# Altium PCB picwithusb_REV_2_0.PcbDoc
Units mil, origin at the board's own origin, x right, y up, seen from the top; angles counter-clockwise.
Board outline 3650 x 2755 mil, 2 copper layers (Top Layer, Bottom Layer); 71 components, 75 nets, 334 pads, 37 vias.
Unrouted connection lines stored in the file: 1.
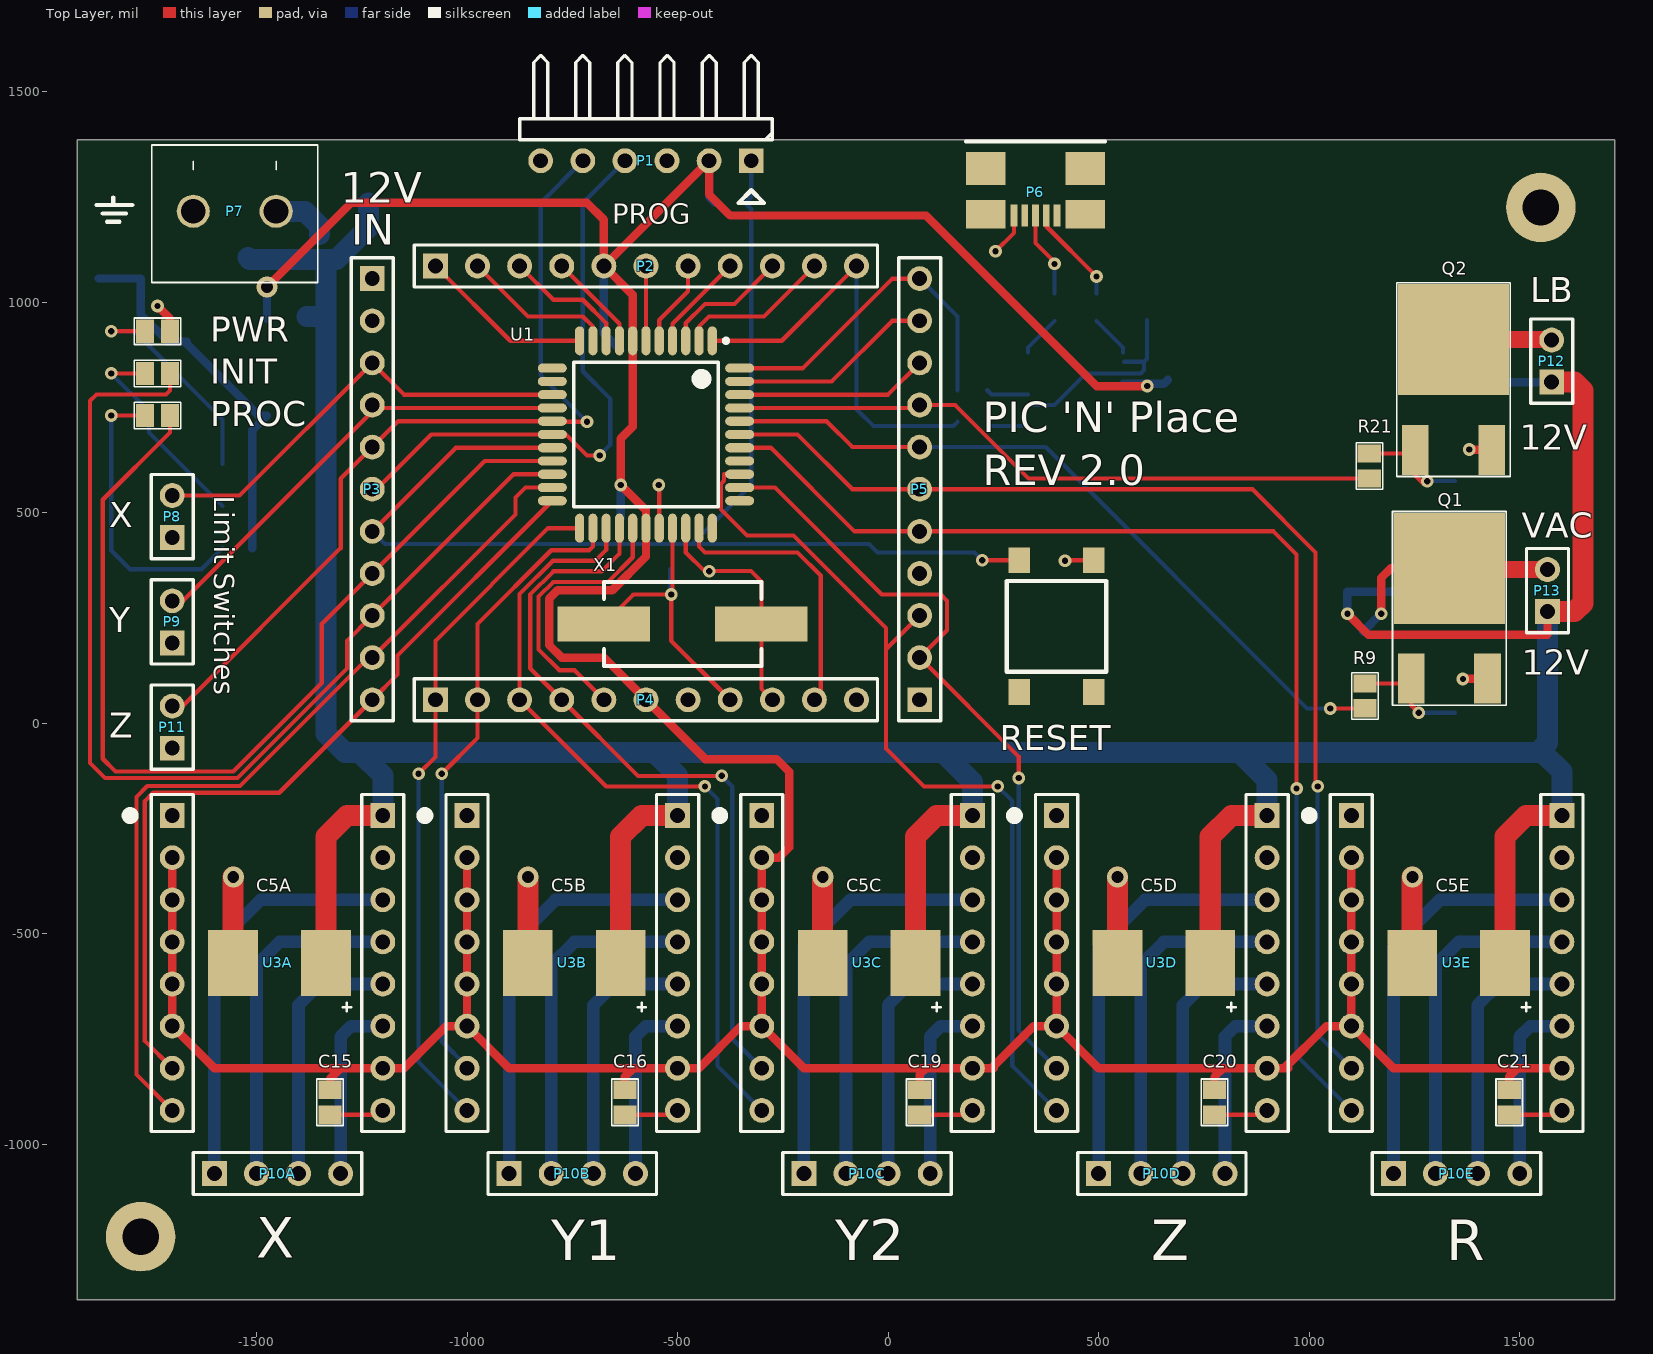
[diagram p0: Top Layer view]
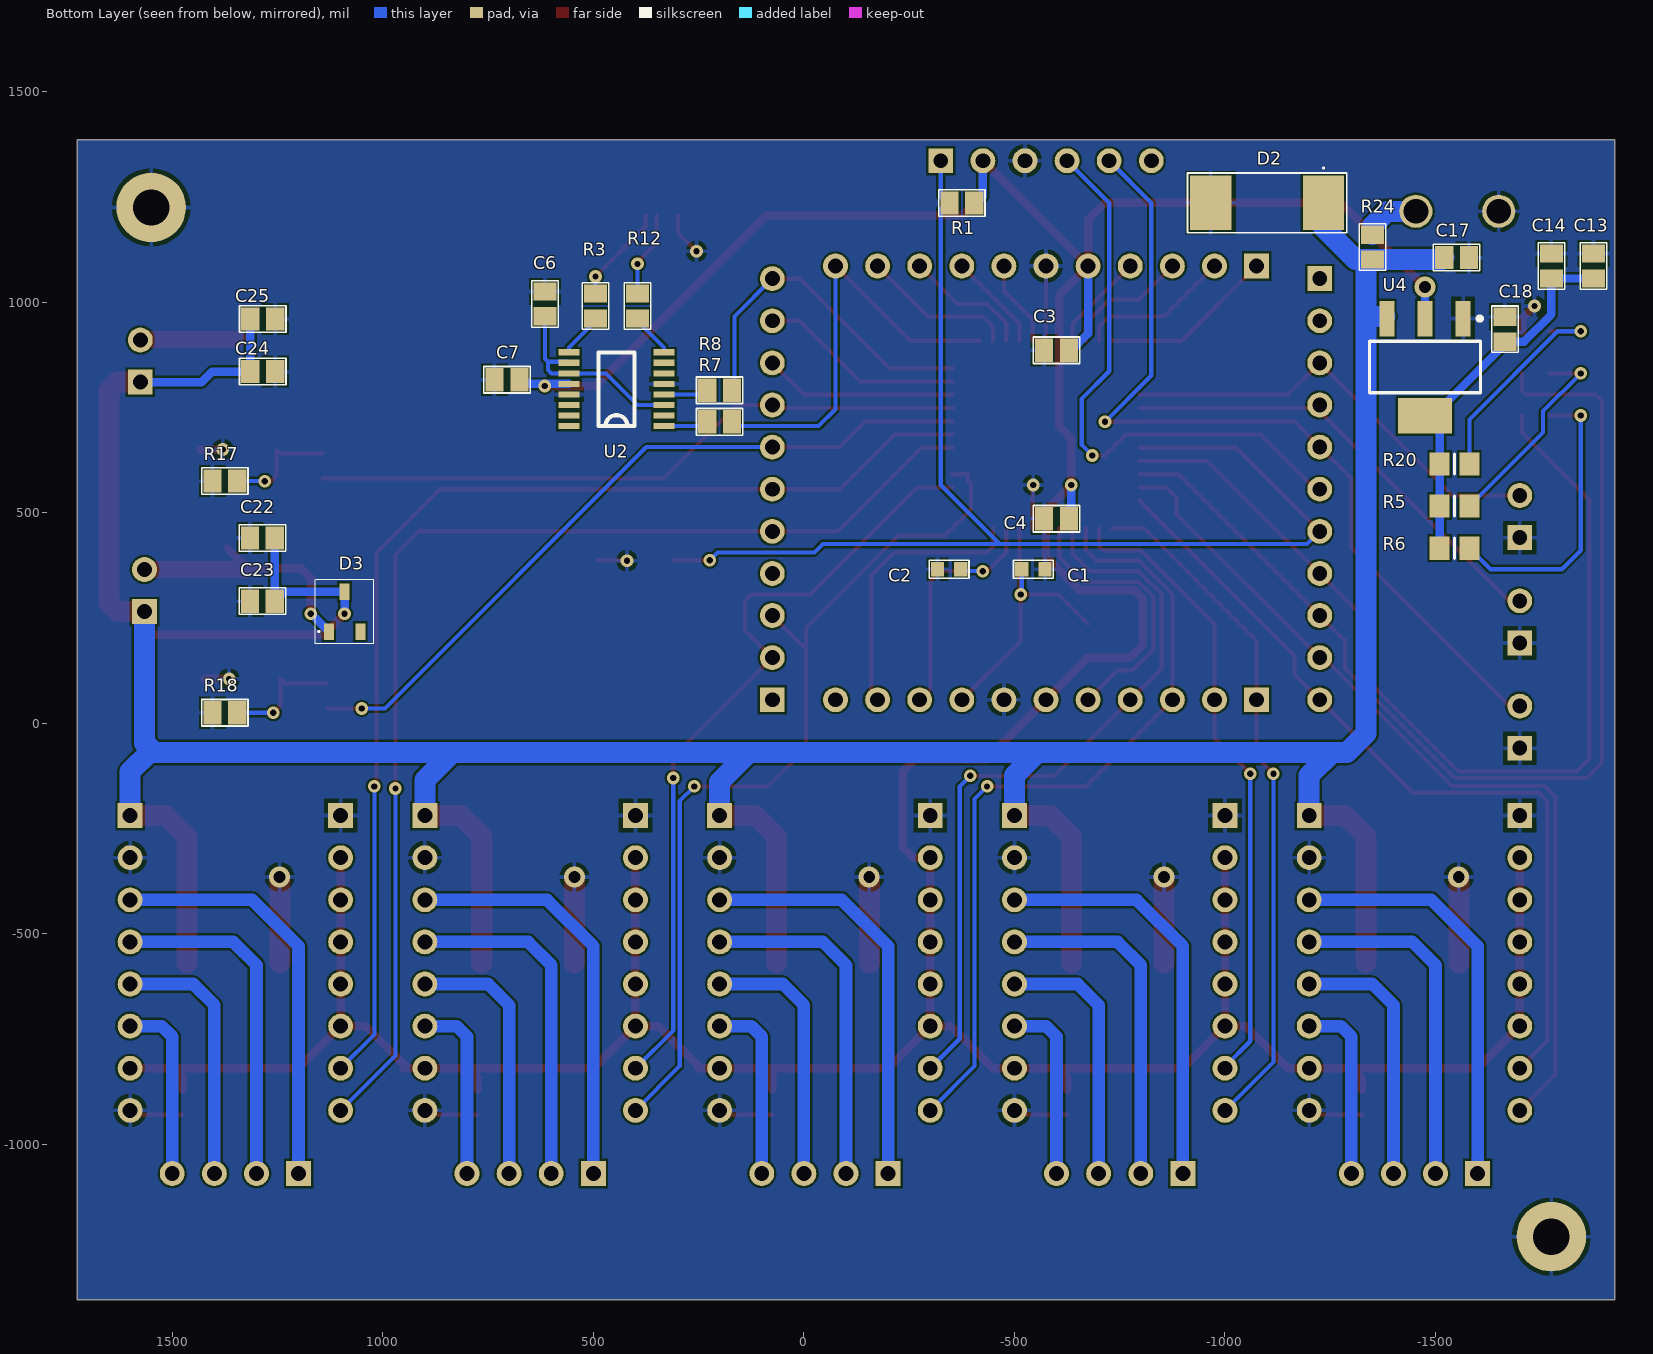
[diagram p1: Bottom Layer view, seen from below]

## Layer stack, top to bottom
Top Solder: solder mask 0.4, Solder Resist, Dk 3.5
Top Layer: signal copper 1.4
Dielectric 1: dielectric 12.6, FR-4, Dk 4.8
Bottom Layer: signal copper 1.4
Bottom Solder: solder mask 0.4, Solder Resist, Dk 3.5

## Board outline
-1925,-1369.21 -1925,1385.79 1725,1385.79 1725,-1369.21

## Design rules (kind name [scope] priority, off if disabled: settings)
Clearance [All] p1: gap=5
PolygonConnect [All] p1: connectstyle=Relief reliefconductorwidth=10 reliefentries=4 polygonreliefangle="90 Angle" airgapwidth=10
RoomDefinition D1 [InComponentClass('D1')] p1: confinementstyle=ConfineIn formatcopy=TRUE lockcomponents=FALSE outline -1825,-1144.21 -1125,-1144.21 -1125,-144.21 -1825,-144.21
RoomDefinition D3 [InComponentClass('D3')] p2: confinementstyle=ConfineIn formatcopy=TRUE lockcomponents=FALSE outline -425,-1144.21 275,-1144.21 275,-144.21 -425,-144.21
RoomDefinition D2 [InComponentClass('D2')] p3: confinementstyle=ConfineIn formatcopy=TRUE lockcomponents=FALSE outline -1125,-1144.21 -425,-1144.21 -425,-144.21 -1125,-144.21
RoomDefinition D4 [InComponentClass('D4')] p4: confinementstyle=ConfineIn formatcopy=TRUE lockcomponents=FALSE outline 275,-1144.21 975,-1144.21 975,-144.21 275,-144.21
RoomDefinition D5 [InComponentClass('D5')] p5: confinementstyle=ConfineIn formatcopy=TRUE lockcomponents=FALSE outline 975,-1144.21 1675,-1144.21 1675,-144.21 975,-144.21
RoutingVias [All] p1: holewidth=15 width=30 viastyle="Through Hole" minholewidth=10 minwidth=14 maxholewidth=28 maxwidth=50
SolderMaskExpansion [All] p1: expansion=4
Width [All] p1: maxlimit=100 minlimit=10 preferedwidth=10
30 further rules are at their usual default settings.

## Classes and differential pairs
component class "Light Box and Vaccuum": C22 C23 C24 C25 D3 P12 P13 Q1 Q2 R9 R17 R18 R21
component class MCU: C1 C2 C3 C4 C15 C16 C19 C20 C21 INIT P1 P2 P3 P4 P5 P8 P9 P11 PROC R1 R5 R6 RESET U1 X1
component class USB: C6 C7 P6 R3 R7 R8 R12 U2
component class D1: C5A P10A U3A
component class D2: C5B P10B U3B
component class D3: C5C P10C U3C
component class D4: C5D P10D U3D
component class D5: C5E P10E U3E
channel class StepperDriver: DRV1 DRV2 DRV3 DRV4 DRV5
component class "Power Supply": C13 C14 C17 C18 D2 P7 PWR R20 R24 U4

## Components (designator, comment, footprint, x,y, rotation, side; value= is the part's Value field where it differs from the comment)
C1 "Cap" 0603 -545,365.79 r0 bottom
C2 "Cap" 0603 -345,365.79 r180 bottom
C3 "Cap" 0805 -600,885.79 r180 bottom
C4 "Cap" 0805 -600,485.79 r180 bottom
C5A "Cap" "Aluminum Electrolytic Short" -1335,-569.21 r180 top (schematic designator C5)
C5B "Cap" "Aluminum Electrolytic Short" -635,-569.21 r180 top (schematic designator C5)
C5C "Cap" "Aluminum Electrolytic Short" 65,-569.21 r180 top (schematic designator C5)
C5D "Cap" "Aluminum Electrolytic Short" 765,-569.21 r180 top (schematic designator C5)
C5E "Cap" "Aluminum Electrolytic Short" 1465,-569.21 r180 top (schematic designator C5)
C6 "Cap" 0805 615,995.79 r270 bottom
C7 "Cap" 0805 705,815.79 r180 bottom
C13 "Cap" 0805 -1875,1085.79 r270 bottom
C14 "Cap" 0805 -1775,1085.79 r270 bottom
C15 "Cap" 0805 -1325,-900 r90 top
C16 "Cap" 0805 -625,-900 r90 top
C17 "Cap" 0805 -1550,1105.79 r0 bottom
C18 "Cap" 0805 -1665,935.79 r270 bottom
C19 "Cap" 0805 75,-900 r90 top
C20 "Cap" 0805 775,-900 r90 top
C21 "Cap" 0805 1475,-900 r90 top
C22 "Cap" 0805 1285.79,440 r180 bottom
C23 "Cap" 0805 1285.79,290 r180 bottom
C24 "Cap" 0805 1285,835 r0 bottom
C25 "Cap" 0805 1285,960 r0 bottom
D2 "Diode S8MC" "S8MC Diode" -1100,1235.79 r180 bottom
D3 "Diode MMBD914" SOT-23 1090.79,265 r90 bottom
INIT "LED1" 0805 -1735,830.79 r0 top
P1 "PICkit3 Connector" "Right Angle PICkit Connector" -325,1335.79 r180 top
P2 "Header 11" HDR1X11 -1075,1085.79 r0 top
P3 "Header 11" HDR1X11 -1225,1055.79 r270 top
P4 "Header 11" HDR1X11 -1075,55.79 r0 top
P5 "Header 11" HDR1X11 75,55.79 r90 top
P6 "USB-B Micro" "USB B Micro WM14338CT-ND" 350,1205.79 r270 top
P7 "Screw Terminal" "Screw Terminal" -1650,1215.79 r0 top
P8 "Header 2" HDR1X2 -1700,440.79 r90 top
P9 "Header 2" HDR1X2 -1700,190.79 r90 top
P10A "Header 4" HDR1X4 -1600,-1069.21 r0 top (schematic designator P10)
P10B "Header 4" HDR1X4 -900,-1069.21 r0 top (schematic designator P10)
P10C "Header 4" HDR1X4 -200,-1069.21 r0 top (schematic designator P10)
P10D "Header 4" HDR1X4 500,-1069.21 r0 top (schematic designator P10)
P10E "Header 4" HDR1X4 1200,-1069.21 r0 top (schematic designator P10)
P11 "Header 2" HDR1X2 -1700,-59.21 r90 top
P12 "Header 2" HDR1X2 1575.79,810 r90 top
P13 "Header 2" HDR1X2 1565.79,265 r90 top
PROC "LED2" 0805 -1735,730.79 r0 top
PWR "LED0" 0805 -1735,930.79 r0 top
Q1 "MOSFET-N" DPAK 1332.79,368 r270 top
Q2 "MOSFET-N" DPAK 1342.79,911 r270 top
R1 "Res1" 0805 -375,1235.79 r180 bottom
R3 "Res1" 0805 495,990.79 r270 bottom
R5 "Res1" 6-0805_N -1545,515.79 r0 bottom
R6 "Res1" 6-0805_N -1545,415.79 r0 bottom
R7 "Res1" 0805 200,715.79 r180 bottom
R8 "Res1" 0805 200,790.79 r0 bottom
R9 "Res1" 0805 1132.79,65 r90 top
R12 "Res1" 0805 395,990.79 r270 bottom
R17 "Resistor" 0805 1375,575 r180 bottom
R18 "Resistor" 0805 1375,25 r180 bottom
R20 "Res1" 6-0805_N -1545,615.79 r0 bottom
R21 "Res1" 0805 1142.79,611 r90 top
R24 "Chip PTC" 0805 -1350,1130.79 r270 bottom
RESET "Switch" TACT_SWITCH 400,230.79 r270 top
U1 "PIC18F4550-I/PT" TQFP-PT44_N -575,685.79 r270 top
U2 "FTDI" FTDI_SSOP_16 445,705.79 r90 bottom
U3A "A4988 Module" "A4988 Header" -1700,-219.21 r0 top (schematic designator U3)
U3B "A4988 Module" "A4988 Header" -1000,-219.21 r0 top (schematic designator U3)
U3C "A4988 Module" "A4988 Header" -300,-219.21 r0 top (schematic designator U3)
U3D "A4988 Module" "A4988 Header" 400,-219.21 r0 top (schematic designator U3)
U3E "A4988 Module" "A4988 Header" 1100,-219.21 r0 top (schematic designator U3)
U4 "5V Reg" "4-Pin SOT223" -1475,845.79 r270 bottom
X1 "Crystal" HC49-US -675,235.79 r0 top

## Footprints (in the part's own frame and the unit in brackets; to place one, negate y for a bottom-side part, rotate by r counter-clockwise, add the part's x,y. Pads: shape width x height; smd on the part's side, far side on the other; paste and mask are expansions set on the pad)
"4-Pin SOT223" [mm] "SOT223, 4-Leads, Body 6.50x7.00mm (avg), Pitch 2.30mm, IPC Medium Density"
  rect 2.15x0.9 smd: 1(-2.925,2.3) 2(-2.925,0) 3(-2.925,-2.3)
  rect 2.15x3.25 smd: 2(2.925,0)
  silkscreen extent -3.05,-3.35 1.55,3.42, body extent -1.85,-3.35 1.85,3.35, height 1.8
6-0805_N [mm] "Chip Resistor, Body 2.0x1.2mm, IPC Medium Density"
  rect 1.2x1.4 smd: 1(-0.9,0) 2(0.9,0)
  silkscreen extent 0,-0.6 0,0.6, body extent -1.07,-0.7 1.07,0.7, height 0.7
0603 [mm]
  rect 0.8x0.9 smd: 1(-0.7,0) 2(0.7,0)
  silkscreen extent -1.2,-0.55 1.2,0.55, body extent -0.87,-0.47 0.88,0.48, height 1.3
0805 [mm]
  rect 1.1x1.4 smd: 1(-0.75,0) 2(0.75,0)
  silkscreen extent -1.4,-0.8 1.4,0.8, body extent -1.1,-0.72 1.1,0.72, height 1.4
"A4988 Header" [mm] "A4988 Header"
  rect 1.5x1.5 hole 0.9: 1(0,0) 16(12.7,0)
  round 1.5 hole 0.9: 2(0,-2.54) 3(0,-5.08) 4(0,-7.62) 5(0,-10.16) 6(0,-12.7) 7(0,-15.24) 8(0,-17.78) 9(12.7,-17.78) 10(12.7,-15.24) 11(12.7,-12.7) 12(12.7,-10.16) 13(12.7,-7.62) 14(12.7,-5.08) 15(12.7,-2.54)
  silkscreen extent -2.67,-19.05 13.97,1.27, body extent -1.27,-19.05 13.97,1.27, height 11.54
"Aluminum Electrolytic Short" [mm] "6.3x5.8mm, 100uF, 35V aluminum electrolytic cap"
  rect 3x4 smd: 1(0,0) 2(5.6,0)
  silkscreen extent -1.52,2.41 -1.02,2.92, body extent -0.81,-3.17 6.19,3.43, height 3.91
DPAK [mm] "DPAK"
  rect 3x1.6 smd: 1(6.65,-2.3) 3(6.65,2.3)
  rect 6.7x6.7 smd: 2(0,0)
  silkscreen extent -3.43,-3.43 8.25,3.43, body extent -2.6,-3.37 7.5,3.37, height 2.37
FTDI_SSOP_16 [mil]
  rect 15x50 smd: 1(0,-113) 2(25,-113) 3(50,-113) 4(75,-113) 5(100,-113) 6(125,-113) 7(150,-113) 8(175,-113) 9(175,113) 10(150,113) 11(125,113) 12(100,113) 13(75,113) 14(50,113) 15(25,113) 16(0,113)
  silkscreen extent 0,-43 175,43
HC49-US [mil]
  rect 220x83 smd: 1(0,0) 2(374,0)
  silkscreen extent 0,-100 374,100, body extent -69,-93 451,95, height 169
HDR1X2 [mm] "Connector; Header; 2 Position"
  rect 1.5x1.5 hole 0.9: 1(0,0)
  round 1.5 hole 0.9: 2(2.54,0)
  silkscreen extent -1.27,-1.27 3.81,1.27, body extent -1.27,-1.27 3.81,1.27, height 8.61
HDR1X4 [mm] "Connector; Header; 4 Position"
  rect 1.5x1.5 hole 0.9: 1(0,0)
  round 1.5 hole 0.9: 2(2.54,0) 3(5.08,0) 4(7.62,0)
  silkscreen extent -1.27,-1.27 8.89,1.27, body extent -1.27,-1.27 8.89,1.27, height 8.61
HDR1X11 [mm] "Connector; Header; 11 Position"
  rect 1.5x1.5 hole 0.9: 1(0,0)
  round 1.5 hole 0.9: 2(2.54,0) 3(5.08,0) 4(7.62,0) 5(10.16,0) 6(12.7,0) 7(15.24,0) 8(17.78,0) 9(20.32,0) 10(22.86,0) 11(25.4,0)
  silkscreen extent -1.27,-1.27 26.67,1.27, body extent -1.27,-1.27 26.67,1.27, height 8.61
"Right Angle PICkit Connector" [mm] "Right Angle PICkit Connector"
  rect 1.5x1.5 hole 0.9: 1(0,0)
  round 1.5 hole 0.9: 2(2.54,0) 3(5.08,0) 4(7.62,0) 5(10.16,0) 6(12.7,0)
  silkscreen extent -1.27,-6.35 13.97,2.54, body extent -1.27,-6.67 13.97,1.27, height 4.8
"S8MC Diode" [mm] "S8MC 8A Diode"
  rect 2.5x3.3 smd: 1(-3.4,0) 2(3.4,0)
  silkscreen extent -4.8,-1.8 4.8,2.15
"Screw Terminal" [mm] "Phoenix Screw Terminal"
  round 2 hole 1.5: 1(0,0) 2(5,0)
  silkscreen extent -2.5,-4.3 7.5,4
SOT-23 [mm] "Standard SOT-23"
  rect 1x0.6 smd: 1(-1.2,0.95) 2(-1.2,-0.95) 3(1.2,0)
  silkscreen extent -1.92,-1.75 1.92,1.75, body extent -1.23,-1.47 1.27,1.53, height 1.05
TACT_SWITCH [mm]
  rect 1.55x1.3 smd: 1(-3.975,2.25) 2(3.975,2.25) 3(-3.975,-2.25) 4(3.975,-2.25)
  silkscreen extent -2.73,-3 2.75,3, body extent -4.25,-3.3 4.25,3.3, height 4.3
TQFP-PT44_N [mm] "Thin QFP, 44-Leads, Body 10x10mm, Pitch 0.8mm, IPC Medium Density"
  oval 1.75x0.55 smd: 1(-5.65,4) 2(-5.65,3.2) 3(-5.65,2.4) 4(-5.65,1.6) 5(-5.65,0.8) 6(-5.65,0) 7(-5.65,-0.8) 8(-5.65,-1.6) 9(-5.65,-2.4) 10(-5.65,-3.2) 11(-5.65,-4) 23(5.65,-4) 24(5.65,-3.2) 25(5.65,-2.4) 26(5.65,-1.6) 27(5.65,-0.8) 28(5.65,0) 29(5.65,0.8) 30(5.65,1.6) 31(5.65,2.4) 32(5.65,3.2) 33(5.65,4)
  oval 0.55x1.75 smd: 12(-4,-5.65) 13(-3.2,-5.65) 14(-2.4,-5.65) 15(-1.6,-5.65) 16(-0.8,-5.65) 17(0,-5.65) 18(0.8,-5.65) 19(1.6,-5.65) 20(2.4,-5.65) 21(3.2,-5.65) 22(4,-5.65) 34(4,5.65) 35(3.2,5.65) 36(2.4,5.65) 37(1.6,5.65) 38(0.8,5.65) 39(0,5.65) 40(-0.8,5.65) 41(-1.6,5.65) 42(-2.4,5.65) 43(-3.2,5.65) 44(-4,5.65)
  silkscreen extent -5.77,-4.35 4.35,4.95, body extent -5,-5 5,5, height 1.2
"USB B Micro WM14338CT-ND" [mm] "MOLEX Micro USB Connector WM14338CT-ND"
  rect 1.35x0.4 smd: 1(0,1.3) 2(0,0.65) 3(0,0) 4(0,-0.65) 5(0,-1.3)
  rect 2x2.4 smd: TAB(-2.825,3) TAB(-2.825,-3)
  rect 1.7x2.4 smd: TAB(-0.075,3) TAB(-0.075,-3)
  silkscreen extent -4.45,-4.2 -4.45,4.2, body extent -5.38,-3.99 0.05,3.99, height 2.77

## Part data
C1 C2 C3 C4 C13 C14 C15 C16 C17 C18 C19 C20 C21 C22 C23 C24 C25: "Capacitor"
C5A C5B C5C C5D C5E: library part "Electrolytic Cap", "Electrolytic Cap"
C6 C7: library part Capacitor, "Chip Capacitor"
D2 D3: "Standard Diode"
INIT PROC: library part LED0, "Typical INFRARED GaAs LED"
P1: library part "PICkit 3 Connector", "PICkit 3 Connector"
P2 P3 P4 P5: "Header, 11-Pin"
P6: library part "USB-B Micro 4 Pad", "USB-B SMT Connector"
P8 P9 P11 P12 P13: "Header, 2-Pin"
P10A P10B P10C P10D P10E: "Header, 4-Pin"
PWR: "Typical INFRARED GaAs LED"
Q1 Q2: library part "N-Channel MOSFET", "N-Channel MOSFET"
R1 R3 R5 R6 R7 R8 R9 R12 R20 R21: "Resistor"
R17 R18: "Chip Resistor"
R24: library part PTC, "PTC"
U1: "High Performance, Enhanced Flash, USB Microcontroller with nanoWatt Technology, 32K Flash, 44-Pin TQFP, Industrial Temperature Range"
U2: "USB-UART Converter"
U4: library part "5V Linear Regulator", "5V Linear Regulator"
X1: library part "Crystal 2-pin", "2-pin crystal resonator"

## Free pads (board coordinates)
  round 165 hole 86: MOUNT(-1775,-1219.21) MOUNT(1550,1225)

## Via types
v1: diameter 30, hole 15, Top Layer to Bottom Layer, 31 vias
v2: diameter 50, hole 28, Top Layer to Bottom Layer, 6 vias

## Nets (pads, with @x,y where several pads share a name; then routed paths per layer and width w, separated by ;. In a path a pad name is that pad's centre, name@x,y a point inside that pad or via, vN(x,y) a via of type N, cw(c..) or ccw(c..) an arc to the next point about the centre after c; other vN are vias at no path point)
1: RESET.2
4: RESET.4
CLK_IN: C1.2 P4.8 U1.30 X1.1 | length 713.3
  Top Layer w10: X1.1 -605,305.79 v1(-515,305.79) ; U1.30 -512.01,308.78 v1(-515,305.79) ; P4.8 -515,195.79 v1(-515,305.79)
  Bottom Layer w10: v1@-517.44,308.23 C1.2
CLK_OUT: C2.2 P4.9 U1.31 X1.2 | length 605.6
  Top Layer w10: U1.31@-480,462.84 U1.31 -480.51,405.79 -436.02,361.3 v1(-424.49,361.3) -325.51,361.3 -301,336.79 X1.2 -301,81.79 P4.9
  Bottom Layer w10: v1(-424.49,361.3) C2.2@-377.05,361.3
DIR1: P3.10 U1.21 U3A.8 | length 2094.8
  Top Layer w10: U3A.8 -1785,-834.21 -1785,-175 -1759.21,-149.21 -1539.21,-149.21 -1234.21,155.79 P3.10 -885,495.79 -885,535.79 -860.98,559.81 U1.21
DIR2: P4.1 U1.23 U3B.8 | length 1632.6
  Top Layer w10: v1(-1115,-120) -1075,-80 P4.1 -1075,195.79 -807.44,463.35 U1.23
  Bottom Layer w10: v1(-1115,-120) -1115,-804.21 U3B.8
DIR3: P4.3 U1.25 U3C.8 | length 1902.3
  Top Layer w10: U1.25 -669.49,411.3 -695,385.79 -796.21,385.79 -875,307 P4.3 -669.21,-150 v1(-435,-150)
  Bottom Layer w10: v1(-435,-150) -405,-180 -405,-814.21 U3C.8
DIR4: P5.3 U1.36 U3D.8 | length 2160.8
  Top Layer w10: U1.36 -389.49,591.3 -389.49,575.95 -397.01,568.43 -397.01,507.8 -335,445.79 -225,445.79 -5,225.79 -5,175.79 ; P5.3 -5,175.79 ; v1(260,-150) 85,-150 -5,-60 -5,175.79
  Bottom Layer w10: v1(260,-150) 295,-185 295,-814.21 U3D.8
DIR5: P5.5 U1.38 U3E.8 | length 2801.4
  Top Layer w10: U1.38 -278.5,654.29 -80,455.79 P5.5 915,455.79 970,400.79 v1(970,-155)
  Bottom Layer w10: v1(970,-155) 970,-789.21 U3E.8
GND: C1.1 C2.1 C3.1 C4.1 C5A.2 C5B.2 C5C.2 C5D.2 C5E.2 C6.1 C7.1 C13.1 C14.1 C15.1 C16.1 C17.1 C18.1 C19.1 C20.1 C21.1 C22.1 C23.1 C24.1 C25.1 D2.1 P1.3 P2.6 P4.7 P6.5 P7.1 P8.1 P9.1 P11.1 pad.MOUNT PWR.2 Q1.3 Q2.3 R17.1 R18.1 RESET.1 U1.6 U1.29 U2.5 U2.13 U3A.1 U3A.9 U3A.15 U3B.1 U3B.9 U3B.15 U3C.1 U3C.9 U3C.15 U3D.1 U3D.9 U3D.15 U3E.1 U3E.9 U3E.15 U4.1 | length 2288.2
  Top Layer w10: C15.1 -1210.32,-929.53 U3A.9 ; C16.1 U3B.9@-510.32,-929.53 ; U1.6 P2.6 ; v1(-545,565.79) -543.5,564.29 U1.29 ; C19.1 189.68,-929.53 U3C.9 ; v1(255,1120.79) 298.82,1164.61 P6.5 ; v1@421.5,387.29 RESET.1 ; C20.1 889.68,-929.53 U3D.9 ; C21.1 1589.68,-929.53 U3E.9
  Top Layer w20: v1(-1735,990.79) -1705.47,961.26 PWR.2 ; v1(420,385.79) v1@421.5,387.29 ; v1(1365,105) 1366.19,106.19 Q1.3 ; v1(1380,650) 1380.81,649.19 Q2.3
  Top Layer w50: C5A.2 v2@-1555.47,-365.47 ; C5B.2 v2@-855.47,-365.47 ; C5C.2 v2@-155.47,-365.47 ; C5D.2 v2@544.53,-365.47 ; C5E.2 v2@1244.53,-365.47
  other v2: -1555,-365 -855,-365 -155,-365 545,-365 1245,-365
MCLR: P1.1 P3.7 R1.1 RESET.3 U1.18 | length 3054.6
  Top Layer w10: P3.7 -1026.5,654.29 U1.18 ; v1(223.5,387.29) RESET.3
  Bottom Layer w10: P3.7 -1195,425.79 -465,425.79 ; P1.1 -325,1250.36 -339.57,1235.79 -325,1221.22 -325,565.79 -465,425.79 ; v1(223.5,387.29) 205,405.79 -25,405.79 -45,425.79 -465,425.79
NetC6_2: C6.2 U2.3 U2.10 U2.11 | length 478.7
  Bottom Layer w10: U2.3 395,755.79 470,830.79 U2.11 600,830.79 607.79,838.58 607.79,858.58 ; U2.10@560.79,858.58 607.79,858.58 ; C6.2@615,957.17 615,865.79 607.79,858.58
NetD3_1: D3.1 P13.2 Q1.2 | length 628.9
  Top Layer w20: v1(1170.79,260.35) 1170.79,345 1193.79,368 Q1.2@1321.79,368 ; Q1.2 Q1.2@1321.79,368 ; Q1.2@1368.79,415 Q1.2@1321.79,368
  Top Layer w40: Q1.2@1324.79,365 P13.2@1570.79,365
  Bottom Layer w20: D3.1 v1(1170.79,260.35)
NetINIT_1: INIT.1 R5.1 | length 499.2
  Top Layer w10: v1(-1845,830.79) INIT.1@-1770.43,830.79
  Bottom Layer w10: v1(-1845,830.79) -1755.43,741.22 -1755.43,690.79 R5.1
NetP6_2: P6.2 R3.1 | length 234.9
  Top Layer w10: P6.2 375.59,1180.2 v1(495,1060.79)
  Bottom Layer w10: R3.1 v1(495,1060.79)
NetP6_3: P6.3 R12.1 | length 204.1
  Top Layer w10: P6.3 350,1140.79 395,1095.79 v1(395,1090.79)
  Bottom Layer w10: R12.1 v1(395,1090.79)
NetP7_2: P7.2 R24.1 | length 138.1
  Bottom Layer w50: P7.2 -1385,1215.79 -1350,1180.79 R24.1
NetP10A_1: P10A.1 U3A.14 | length 985.6
  Bottom Layer w30: P10A.1 -1600,-529.21 -1490,-419.21 U3A.14
NetP10A_2: P10A.2 U3A.13 | length 817.8
  Bottom Layer w30: P10A.2 -1500,-574.21 -1445,-519.21 U3A.13
NetP10A_3: P10A.3 U3A.12 | length 620.7
  Bottom Layer w30: P10A.3 -1400,-669.21 -1350,-619.21 U3A.12
NetP10A_4: P10A.4 U3A.11 | length 435.4
  Bottom Layer w30: P10A.4 -1300,-744.21 -1275,-719.21 U3A.11
NetP10B_1: P10B.1 U3B.14 | length 985.6
  Bottom Layer w30: P10B.1 -900,-529.21 -790,-419.21 U3B.14
NetP10B_2: P10B.2 U3B.13 | length 817.8
  Bottom Layer w30: P10B.2 -800,-574.21 -745,-519.21 U3B.13
NetP10B_3: P10B.3 U3B.12 | length 620.7
  Bottom Layer w30: P10B.3 -700,-669.21 -650,-619.21 U3B.12
NetP10B_4: P10B.4 U3B.11 | length 435.4
  Bottom Layer w30: P10B.4 -600,-744.21 -575,-719.21 U3B.11
NetP10C_1: P10C.1 U3C.14 | length 985.6
  Bottom Layer w30: P10C.1 -200,-529.21 -90,-419.21 U3C.14
NetP10C_2: P10C.2 U3C.13 | length 817.8
  Bottom Layer w30: P10C.2 -100,-574.21 -45,-519.21 U3C.13
NetP10C_3: P10C.3 U3C.12 | length 620.7
  Bottom Layer w30: P10C.3 0,-669.21 50,-619.21 U3C.12
NetP10C_4: P10C.4 U3C.11 | length 435.4
  Bottom Layer w30: P10C.4 100,-744.21 125,-719.21 U3C.11
NetP10D_1: P10D.1 U3D.14 | length 985.6
  Bottom Layer w30: P10D.1 500,-529.21 610,-419.21 U3D.14
NetP10D_2: P10D.2 U3D.13 | length 817.8
  Bottom Layer w30: P10D.2 600,-574.21 655,-519.21 U3D.13
NetP10D_3: P10D.3 U3D.12 | length 620.7
  Bottom Layer w30: P10D.3 700,-669.21 750,-619.21 U3D.12
NetP10D_4: P10D.4 U3D.11 | length 435.4
  Bottom Layer w30: P10D.4 800,-744.21 825,-719.21 U3D.11
NetP10E_1: P10E.1 U3E.14 | length 985.6
  Bottom Layer w30: P10E.1 1200,-529.21 1310,-419.21 U3E.14
NetP10E_2: P10E.2 U3E.13 | length 817.8
  Bottom Layer w30: P10E.2 1300,-574.21 1355,-519.21 U3E.13
NetP10E_3: P10E.3 U3E.12 | length 620.7
  Bottom Layer w30: P10E.3 1400,-669.21 1450,-619.21 U3E.12
NetP10E_4: P10E.4 U3E.11 | length 435.4
  Bottom Layer w30: P10E.4 1500,-744.21 1525,-719.21 U3E.11
NetP12_2: P12.2 Q2.2 | length 225
  Top Layer w40: Q2.2 P12.2@1567.79,911
NetPROC_1: PROC.1 R6.1 | length 698.5
  Top Layer w10: v1(-1845,730.79) PROC.1@-1770.43,730.79
  Bottom Layer w10: v1(-1845,730.79) -1845,410.79 -1800,365.79 -1630.43,365.79 R6.1
NetPWR_1: PWR.1 R20.1 | length 531.4
  Top Layer w10: v1(-1845,930.79) PWR.1@-1770.43,930.79
  Bottom Layer w10: v1(-1845,930.79) -1790,930.79 -1580.43,721.22 R20.1
NetQ1_1: Q1.1 R9.2 R18.2 | length 288.3
  Top Layer w10: R9.2 1230.58,94.53 Q1.1 1242.24,42.76 v1(1260,25)
  Bottom Layer w10: v1(1260,25) R18.2
NetQ2_1: Q2.1 R17.2 R21.2 | length 280.1
  Top Layer w10: R21.2 1243.58,640.53 Q2.1 1252.24,587.76 1270,570 1280,570 v1(1280,575)
  Bottom Layer w10: v1(1280,575) R17.2
NetR3_2: R3.2 U2.9 | length 100.7
  Bottom Layer w10: R3.2@495,955.36 558,892.36 U2.9
NetR7_1: R7.1 U2.1 | length 86.6
  Bottom Layer w10: R7.1@245.43,705.79 U2.1
NetR8_2: R8.2 U2.4 | length 100.7
  Bottom Layer w10: R8.2@235.43,790.79 245.43,780.79 U2.4
NetR12_2: R12.2 U2.8 | length 100.7
  Bottom Layer w10: U2.8 332,892.36 R12.2@395,955.36
PGC: P1.5 P3.5 P11.2 U1.16 | length 2044.5
  Top Layer w10: P11.2@-1675,40.79 -1300,415.79 -1300,580.79 P3.5 -1163.5,717.29 U1.16 -795.94,715.79 v1(-715,715.79)
  Bottom Layer w10: P1.5 -825,1235.79 -825,825.79 v1(-715,715.79)
PGD: P1.4 P3.6 U1.17 | length 1393.3
  Top Layer w10: P3.6 -1215,555.79 -1085,685.79 U1.17 -765,685.79 -715,635.79 v1(-685,635.79)
  Bottom Layer w10: v1(-685,635.79) -660,660.79 -660,770.79 -725,835.79 -725,1235.79 P1.4
RA0: P3.8 PROC.2 U1.19 | length 2348.4
  Top Layer w10: PROC.2 -1705.47,690.32 -1865,530.79 -1865,-84.21 -1835,-114.21 -1555,-114.21 -1345,95.79 -1345,235.79 P3.8 -957.99,622.8 U1.19
RA1: INIT.2 P3.9 U1.20 | length 2549.9
  Top Layer w10: INIT.2 -1705.47,790.32 -1715,780.79 -1880,780.79 -1895,765.79 -1895,-94.21 -1859.21,-130 -1545,-130 -1285,130 -1285,195.79 P3.9 -889.49,591.3 U1.20
RA3: P3.11 U1.22 U3A.7 | length 1950.5
  Top Layer w10: U3A.7 -1765,-754.21 -1765,-185 -1745,-165 -1445.79,-165 P3.11 -1165,115.79 -1165,160.75 U1.22
RA5: P4.2 U1.24 U3B.7 | length 1504.6
  Top Layer w10: v1(-1060,-120) -975,-35 P4.2 -975,235.79 -800,410.79 -710,410.79 -700.98,419.81 U1.24
  Bottom Layer w10: v1(-1060,-120) -1060,-755 U3B.7@-1000,-815
RB0: P2.4 U1.8 | length 234.3
  Top Layer w10: P2.4 -637.99,948.78 U1.8
RB1: P2.3 U1.9 | length 303.7
  Top Layer w10: P2.3 -795,1005.79 -725,1005.79 -669.49,950.28 U1.9
RB2: P2.2 U1.10 | length 367.2
  Top Layer w10: P2.2 -855,965.79 -725,965.79 -700.98,941.77 U1.10
RB3: P2.1 U1.11 | length 416.1
  Top Layer w10: P2.1 -897.44,908.23 U1.11
RB4: P3.3 P8.2 U1.14 | length 1064.3
  Top Layer w10: P8.2 -1540,540.79 P3.3 -1149.49,780.28 U1.14
RB5: P3.4 P9.2 U1.15 | length 1056.9
  Top Layer w10: P9.2@-1675,290.79 P3.4@-1225,740.79 ; P3.4@-1217.99,748.78 U1.15
RC0: P4.10 U1.32 | length 662.4
  Top Layer w10: U1.32 -449.02,419.81 -435,405.79 -215,405.79 -160,350.79 -160,70.79 P4.10
RC1: P5.2 U1.35 U3D.7 | length 1875.5
  Top Layer w10: U1.35 -269.02,559.81 -15,305.79 125,305.79 140,290.79 140,220.79 P5.2 310,-79.21 v1(310,-130)
  Bottom Layer w10: v1(310,-130) 310,-729.21 U3D.7
RC4: P5.9 U1.42 | length 458.8
  Top Layer w10: U1.42 -0.51,780.28 P5.9
RC5: P5.10 U1.43 | length 487.2
  Top Layer w10: U1.43 -134.02,811.77 10,955.79 P5.10
RC6: P5.11 R8.1 U1.44 | length 817.7
  Top Layer w10: U1.44 -202.52,843.27 10,1055.79 P5.11
  Bottom Layer w10: P5.11 164.57,966.22 R8.1@164.57,790.79
RC7: P2.11 R7.2 U1.1 | length 1016.3
  Top Layer w10: U1.1 -252.56,908.23 P2.11
  Bottom Layer w10: P2.11 -75,745.79 -35,705.79 154.57,705.79 R7.2@164.57,715.79
RD1: P5.6 U1.39 U3E.7 | length 2743.7
  Top Layer w10: U1.39 -215,685.79 -85,555.79 P5.6 865,555.79 1015,405.79 1015,-145 v1(1020,-150)
  Bottom Layer w10: v1(1020,-150) 1020,-739.21 U3E.7
RD2: P5.7 R9.1 U1.40 | length 1767.5
  Top Layer w10: U1.40 -146.5,717.29 -85,655.79 P5.7 ; v1(1050,35) R9.1@1132.32,35
  Bottom Layer w10: P5.7 374.21,655.79 995,35 v1(1050,35)
RD3: P5.8 R21.1 U1.41 | length 1570.5
  Top Layer w10: U1.41 67.99,748.78 P5.8 159.21,755.79 333.53,581.47 R21.1
RD4: P2.10 U1.2 | length 367.2
  Top Layer w10: U1.2 -449.02,941.78 -425,965.79 -295,965.79 P2.10
RD5: P2.9 U1.3 | length 303.7
  Top Layer w10: U1.3 -480.51,950.28 -435,995.79 -365,995.79 P2.9
RD6: P2.8 U1.4 | length 234.3
  Top Layer w10: U1.4 -512.01,948.78 P2.8
RD7: P2.7 U1.5 | length 205.9
  Top Layer w10: U1.5 -543.5,957.29 -475,1025.79 P2.7
RE1: P4.4 U1.26 U3C.7 | length 1782.3
  Top Layer w10: U1.26 -637.99,402.8 -680,360.79 -795,360.79 -850,305.79 -850,130.79 P4.4 -594.21,-125 v1(-395,-125)
  Bottom Layer w10: v1(-395,-125) -370,-150 -370,-749.21 U3C.7
RE2: P4.5 U1.27 | length 661.5
  Top Layer w10: P4.5 -745,125.79 -780.79,125.79 -830,175 -830,300.79 -795,335.79 -665,335.79 -606.5,394.29 U1.27
VCC: C3.2 C4.2 C7.2 C13.2 C14.2 C15.2 C16.2 C18.2 C19.2 C20.2 C21.2 P1.2 P2.5 P4.6 R1.2 R5.2 R6.2 R20.2 U1.7 U1.28 U2.12 U3A.2 U3A.3 U3A.4 U3A.5 U3A.6 U3A.10 U3B.2 U3B.3 U3B.4 U3B.5 U3B.6 U3B.10 U3C.2 U3C.3 U3C.4 U3C.5 U3C.6 U3C.10 U3D.2 U3D.3 U3D.4 U3D.5 U3D.6 U3D.10 U3E.2 U3E.3 U3E.4 U3E.5 U3E.6 U3E.10 U4.2 | length 12247.2
  Top Layer w20: U3A.2 U3A.3 U3A.4 U3A.5 U3A.6 -1600,-819.21 -1300,-819.21 ; v2(-1475,1035.79) -1275,1235.79 -715,1235.79 -675,1195.79 P2.5 ; C15.2 -1325,-844.21 -1300,-819.21 ; U3B.2 U3B.3 U3B.4 U3B.5 U3B.6 ; C16.2 -625,-839.21 -605,-819.21 ; C19.2 75,-834.21 90,-819.21 ; 245.79,-819.21 345.79,-719.21 U3D.6 ; 250.79,-819.21 U3C.10 90,-819.21 ; U3D.2 U3D.3 U3D.4 U3D.5 U3D.6 ; v1(615,800.79) 495,800.79 90,1205.79 -375,1205.79 -425,1255.79 P1.2 P2.5 ; C20.2 775,-839.21 795,-819.21 ; 940.79,-819.21 1040.79,-719.21 U3E.6 ; 950.79,-819.21 U3D.10 795,-819.21 ; U3E.2 U3E.3 U3E.4 U3E.5 U3E.6 ; C21.2 1475,-839.21 1495,-819.21 ; U3E.10 1495,-819.21 ; -1300,-819.21 U3A.10 -1149.21,-819.21 -1049.21,-719.21 U3B.6 ; U3B.6 -900,-819.21 -605,-819.21 ; P2.5 -606.5,1017.29 U1.7 -606.5,704.29 -635,675.79 v1(-635,565.79) -575,505.79 U1.28 -575,395.79 -655,315.79 -785,315.79 -805,295.79 -805,185.79 -775,155.79 -675,155.79 P4.6 -434.21,-85 -265,-85 -235,-115 -235,-295 -259.21,-319.21 U3C.2 U3C.3 U3C.4 U3C.5 U3C.6 ; -605,-819.21 U3B.10 -449.21,-819.21 -349.21,-719.21 U3C.6 ; U3C.6 -200,-819.21 90,-819.21 ; U3D.6 500,-819.21 795,-819.21 ; U3E.6 1200,-819.21 1495,-819.21
  Bottom Layer w20: C13.2 C14.2 -1775,970.79 -1710.47,906.26 C18.2 ; C18.2@-1665,900.36 -1495.28,730.63 -1475,730.63 -1509.57,696.07 R20.2 R5.2 R6.2 ; U4.2@-1475,960.95 v2(-1475,1035.79) ; P2.5 -675,925.36 C3.2@-635.43,885.79 ; C4.2@-635,486.22 v1(-635,565.79) ; P1.2 -425,1250.36 R1.2@-410.43,1235.79 ; U2.12 v1@615,805.79 ; v1(615,800.79) v1@615,805.79 ; C7.2@664.57,815.79 654.57,805.79 v1@615,805.79
VINA: C5A.1 C5B.1 C5C.1 C5D.1 C5E.1 C17.2 C22.2 C23.2 C24.2 C25.2 D2.2 D3.3 P12.1 P13.1 R24.2 U3A.16 U3B.16 U3C.16 U3D.16 U3E.16 U4.3 | length 9955.1
  Top Layer w20: v1(1090.79,260) 1140.79,210 1565.79,210 P13.1
  Top Layer w50: C5A.1 -1335,-269.21 -1285,-219.21 U3A.16 ; C5B.1 -635,-269.21 -585,-219.21 U3B.16 ; C5C.1 65,-269.21 115,-219.21 U3C.16 ; C5D.1 765,-269.21 815,-219.21 U3D.16 ; C5E.1 1465,-269.21 1515,-219.21 U3E.16 ; P13.1 1630,265 1650,285 1650,790 1630,810 P12.1
  Bottom Layer w20: v1(1090.79,260) D3.3 1234.02,312.24 C23.2 C22.2 ; C25.2 C24.2 1405,835 1430,810 P12.1
  Bottom Layer w50: C17.2 -1515.95,1101.26 R24.2 ; U4.3@-1379.61,965.79 -1335,965.79 ; D2.2 -1233.86,1176.93 -1309.53,1101.26 R24.2 ; U3A.16 -1200,-124.21 -1255,-69.21 ; U3B.16 -500,-124.21 -555,-69.21 ; U3C.16 200,-139.21 130,-69.21 ; U3D.16 900,-134.21 835,-69.21 ; P13.1 1565.79,-46.55 1554.21,-58.13 1554.21,-69.21 ; U3E.16 1600,-115 1554.21,-69.21 ; R24.2 -1335,1086.26 -1335,965.79 ; -1335,965.79 -1335,-24.21 -1290,-69.21 -1255,-69.21 ; -1255,-69.21 -555,-69.21 ; -555,-69.21 130,-69.21 ; 130,-69.21 835,-69.21 ; 835,-69.21 1554.21,-69.21
pads on no net: D3.2 P1.6 P3.1 P3.2 P4.11 P5.1 P5.4 P6.1 P6.4 P6.TAB U1.12 U1.13 U1.33 U1.34 U1.37 U2.2 U2.6 U2.7 U2.14 U2.15 U2.16

## Polygon pours and split planes (outlines as drawn)
GND on Bottom Layer "GND" (solid, remove dead copper, pour order 6): -1925,-1369.21 -1925,1385.79 1725,1385.79 1725,-1369.21

## Silkscreen, mask and mechanical layers (free items; w line width, h text height)
Top Overlay:
  lines w10: -1880,1230.79 -1795,1230.79 ; -1865,1210.79 -1810,1210.79 ; -1855,1190.79 -1825,1190.79 ; -1840,1230.79 -1840,1248.29
  text "12V" at -1300,1235.79 h72
  text "PROG" at -655,1185.79 h48
  text "IN" at -1275,1135.79 h72
  text "LB" at 1525,1000 h60
  text "PIC 'N' Place" at 225,690.79 h72
  text "12V" at 1500,650 h60
  text "REV 2.0" at 225,565.79 h72
  text "Limit Switches" at -1600,540.79 h48 r270
  text "X" at -1850,465.79 h60
  text "VAC" at 1505,440 h60
  text "Y" at -1850,215.79 h60
  text "12V" at 1505,115 h60
  text "Z" at -1850,-34.21 h60
  text "X" at -1500,-1269.21 h96
  text "Y1" at -800,-1275 h96
  text "Y2" at -125,-1275 h96
  text "Z" at 625,-1275 h96
  text "R" at 1325,-1275 h96
Mechanical 1:
  the board outline again, w10